# EAGLE board Proto_Cape (EAGLE 7.7.0)
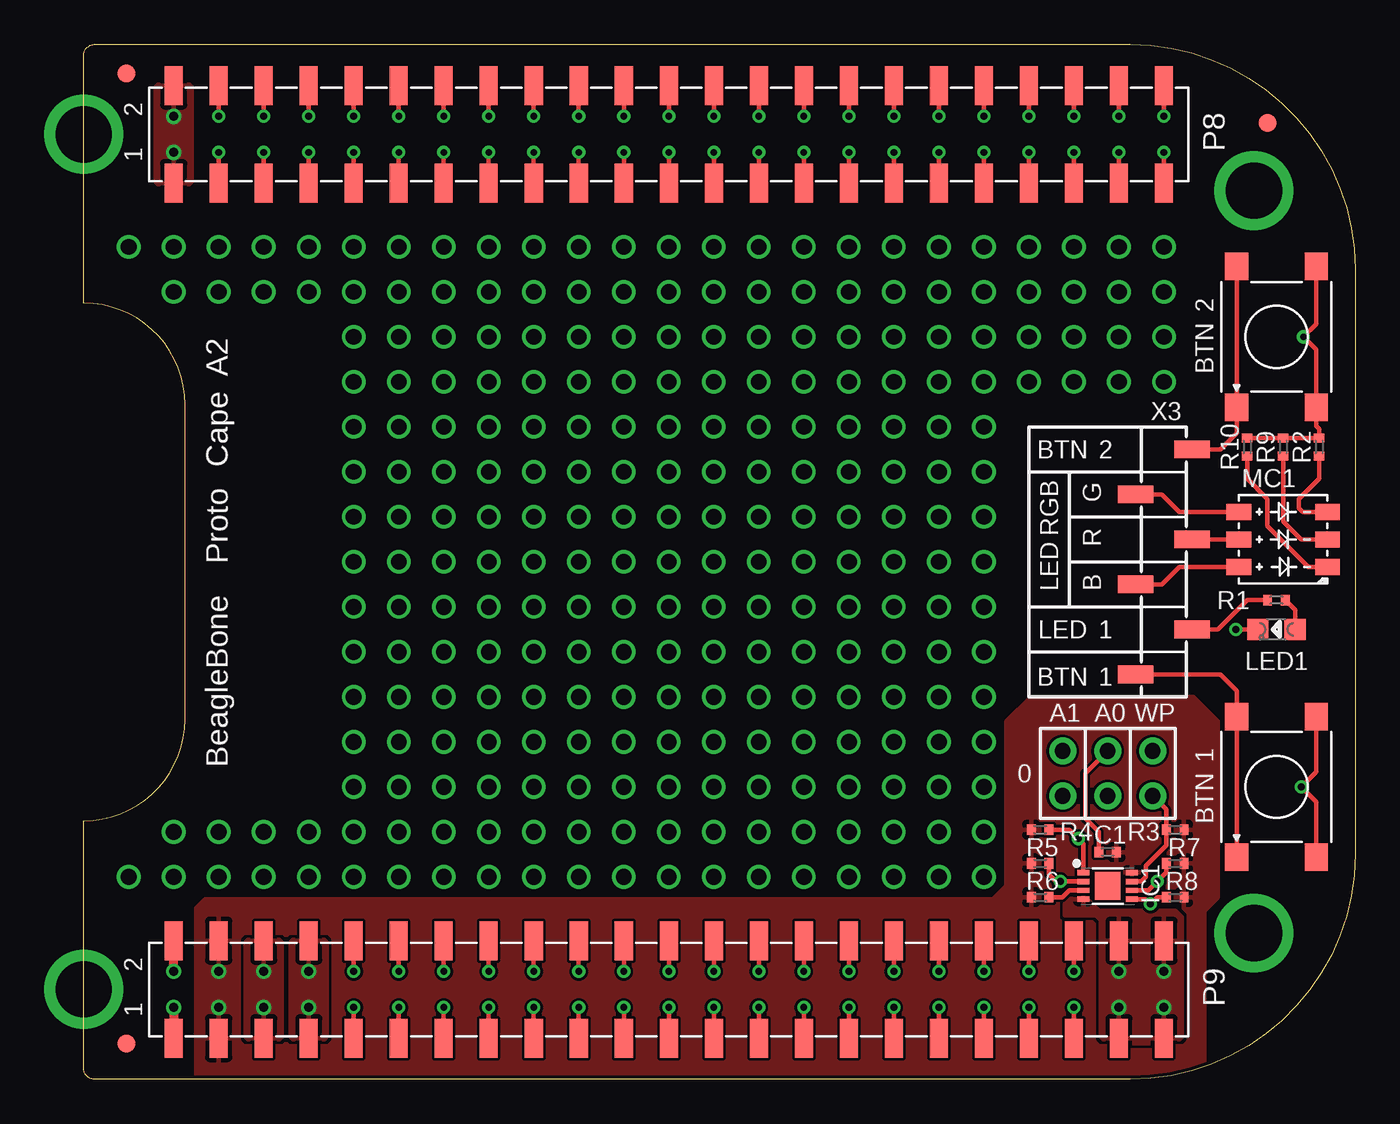
[diagram p0: board, top side]
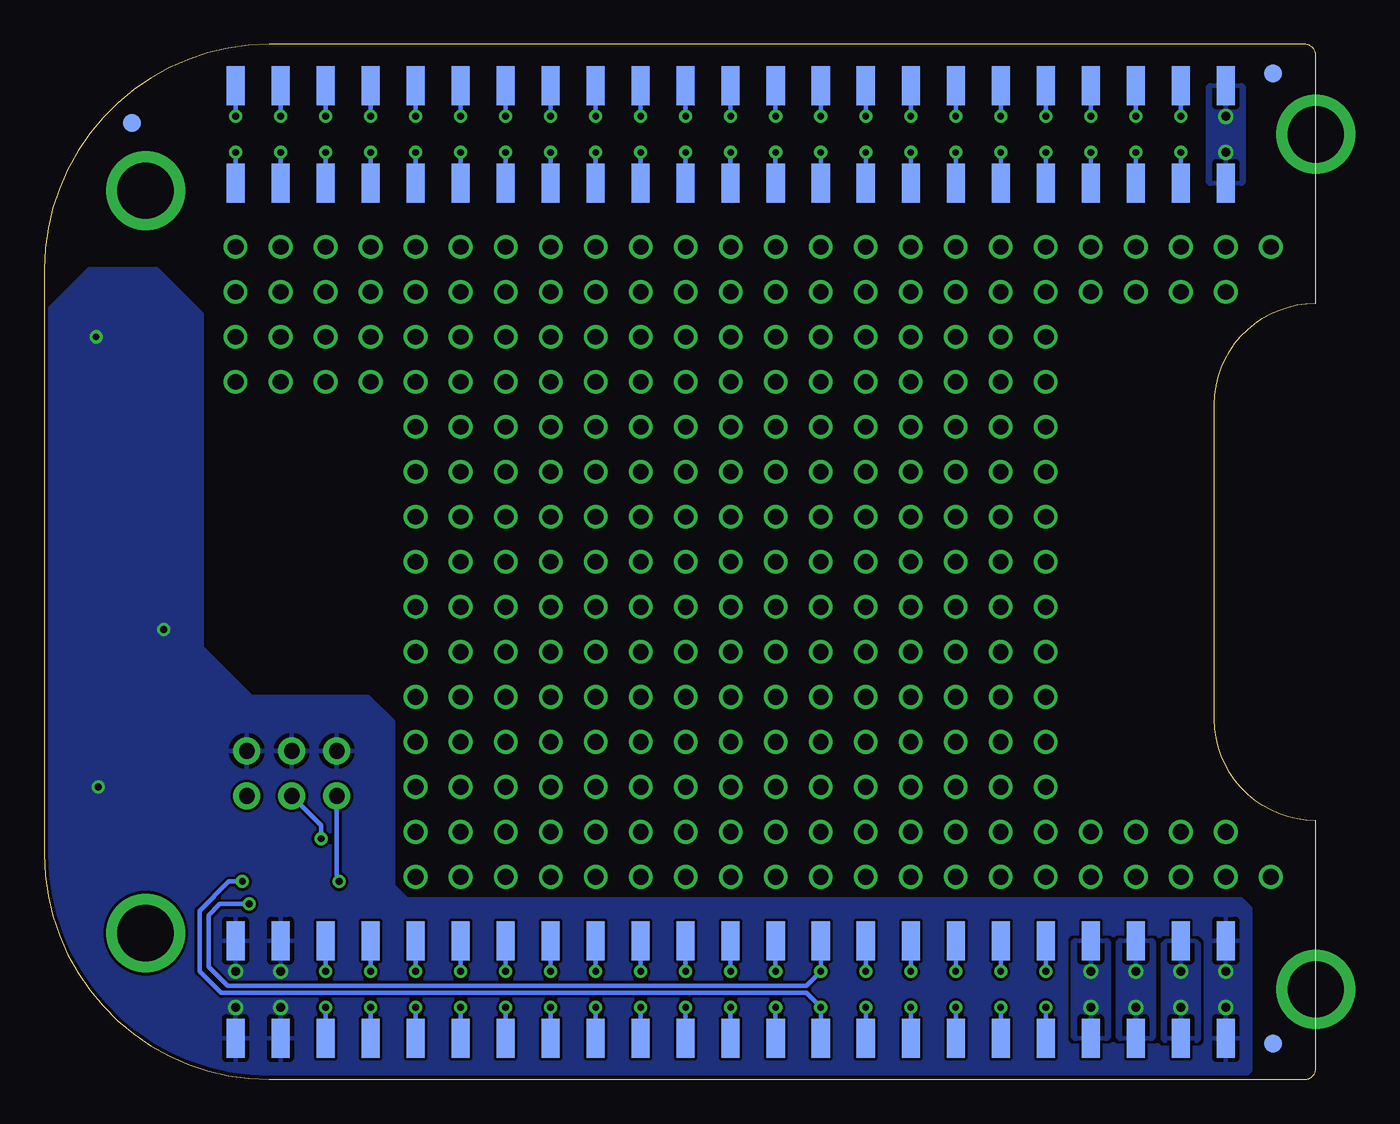
[diagram p1: board, bottom side, seen from below]

Size 71.75 x 58.42 mm. Coordinates in mm from the lower left corner, seen from the top.
Copper layers (1+16): Top 0.035mm / dielectric 1.5mm / Bottom 0.035mm
Design rules "SparkFun-2-layer *": minimum track width 7mil, minimum drill 15mil, track to track 6mil, track to pad 6mil, pad to pad 6mil, via to via 6mil, smd to smd 6mil, copper to edge 8mil, drill to drill 8mil, minimum pad ring 12mil, minimum via ring 7mil, stop-mask expansion 4mil, vias tented up to drill 32mil, thermal gap 10mil

## Footprints (pad centres in the part's own frame; a part is rotated, then mirrored left to right if it is on the bottom)
BEAGLEBONE.CAPE.TOP/BOTTOM-PADS = smd 1.02 x 2.2 bottom: B8.1 5.08,50.59; B8.2 5.08,56.09; B8.3 7.62,50.59; B8.4 7.62,56.09; B8.5 10.16,50.59; B8.6 10.16,56.09; B8.7 12.7,50.59; B8.8 12.7,56.09; B8.9 15.24,50.59; B8.10 15.24,56.09; B8.11 17.78,50.59; B8.12 17.78,56.09; B8.13 20.32,50.59; B8.14 20.32,56.09; B8.15 22.86,50.59; B8.16 22.86,56.09; B8.17 25.4,50.59; B8.18 25.4,56.09; B8.19 27.94,50.59; B8.20 27.94,56.09; B8.21 30.48,50.59; B8.22 30.48,56.09; B8.23 33.02,50.59; B8.24 33.02,56.09; B8.25 35.56,50.59; B8.26 35.56,56.09; B8.27 38.1,50.59; B8.28 38.1,56.09; B8.29 40.64,50.59; B8.30 40.64,56.09; B8.31 43.18,50.59; B8.32 43.18,56.09; B8.33 45.72,50.59; B8.34 45.72,56.09; B8.35 48.26,50.59; B8.36 48.26,56.09; B8.37 50.8,50.59; B8.38 50.8,56.09; B8.39 53.34,50.59; B8.40 53.34,56.09; B8.41 55.88,50.59; B8.42 55.88,56.09; B8.43 58.42,50.59; B8.44 58.42,56.09; B8.45 60.96,50.59; B8.46 60.96,56.09; B9.1 5.08,2.33; B9.2 5.08,7.83; B9.3 7.62,2.33; B9.4 7.62,7.83; B9.5 10.16,2.33; B9.6 10.16,7.83; B9.7 12.7,2.33; B9.8 12.7,7.83; B9.9 15.24,2.33; B9.10 15.24,7.83; B9.11 17.78,2.33; B9.12 17.78,7.83; B9.13 20.32,2.33; B9.14 20.32,7.83; B9.15 22.86,2.33; B9.16 22.86,7.83; B9.17 25.4,2.33; B9.18 25.4,7.83; B9.19 27.94,2.33; B9.20 27.94,7.83; B9.21 30.48,2.33; B9.22 30.48,7.83; B9.23 33.02,2.33; B9.24 33.02,7.83; B9.25 35.56,2.33; B9.26 35.56,7.83; B9.27 38.1,2.33; B9.28 38.1,7.83; B9.29 40.64,2.33; B9.30 40.64,7.83; B9.31 43.18,2.33; B9.32 43.18,7.83; B9.33 45.72,2.33; B9.34 45.72,7.83; B9.35 48.26,2.33; B9.36 48.26,7.83; B9.37 50.8,2.33; B9.38 50.8,7.83; B9.39 53.34,2.33; B9.40 53.34,7.83; B9.41 55.88,2.33; B9.42 55.88,7.83; B9.43 58.42,2.33; B9.44 58.42,7.83; B9.45 60.96,2.33; B9.46 60.96,7.83 | drill 3.175 pad 4.445: MH.1 0,5.08; MH.2 66.04,8.255; MH.3 66.04,50.165; MH.4 0,53.34 | smd 1.02 x 2.2: T8.1 5.08,50.59; T8.2 5.08,56.09; T8.3 7.62,50.59; T8.4 7.62,56.09; T8.5 10.16,50.59; T8.6 10.16,56.09; T8.7 12.7,50.59; T8.8 12.7,56.09; T8.9 15.24,50.59; T8.10 15.24,56.09; T8.11 17.78,50.59; T8.12 17.78,56.09; T8.13 20.32,50.59; T8.14 20.32,56.09; T8.15 22.86,50.59; T8.16 22.86,56.09; T8.17 25.4,50.59; T8.18 25.4,56.09; T8.19 27.94,50.59; T8.20 27.94,56.09; T8.21 30.48,50.59; T8.22 30.48,56.09; T8.23 33.02,50.59; T8.24 33.02,56.09; T8.25 35.56,50.59; T8.26 35.56,56.09; T8.27 38.1,50.59; T8.28 38.1,56.09; T8.29 40.64,50.59; T8.30 40.64,56.09; T8.31 43.18,50.59; T8.32 43.18,56.09; T8.33 45.72,50.59; T8.34 45.72,56.09; T8.35 48.26,50.59; T8.36 48.26,56.09; T8.37 50.8,50.59; T8.38 50.8,56.09; T8.39 53.34,50.59; T8.40 53.34,56.09; T8.41 55.88,50.59; T8.42 55.88,56.09; T8.43 58.42,50.59; T8.44 58.42,56.09; T8.45 60.96,50.59; T8.46 60.96,56.09; T9.1 5.08,2.33; T9.2 5.08,7.83; T9.3 7.62,2.33; T9.4 7.62,7.83; T9.5 10.16,2.33; T9.6 10.16,7.83; T9.7 12.7,2.33; T9.8 12.7,7.83; T9.9 15.24,2.33; T9.10 15.24,7.83; T9.11 17.78,2.33; T9.12 17.78,7.83; T9.13 20.32,2.33; T9.14 20.32,7.83; T9.15 22.86,2.33; T9.16 22.86,7.83; T9.17 25.4,2.33; T9.18 25.4,7.83; T9.19 27.94,2.33; T9.20 27.94,7.83; T9.21 30.48,2.33; T9.22 30.48,7.83; T9.23 33.02,2.33; T9.24 33.02,7.83; T9.25 35.56,2.33; T9.26 35.56,7.83; T9.27 38.1,2.33; T9.28 38.1,7.83; T9.29 40.64,2.33; T9.30 40.64,7.83; T9.31 43.18,2.33; T9.32 43.18,7.83; T9.33 45.72,2.33; T9.34 45.72,7.83; T9.35 48.26,2.33; T9.36 48.26,7.83; T9.37 50.8,2.33; T9.38 50.8,7.83; T9.39 53.34,2.33; T9.40 53.34,7.83; T9.41 55.88,2.33; T9.42 55.88,7.83; T9.43 58.42,2.33; T9.44 58.42,7.83; T9.45 60.96,2.33; T9.46 60.96,7.83
0402 = smd 0.5 x 0.6: 1 -0.5,0; 2 0.5,0
FIDUCIAL_40MIL = smd 1.016 x 1.016: P$1 0,0
UDFN8,2X3(ON-SEMI) = smd 0.3 x 0.68: 1 0.75,1.36; 2 0.25,1.36; 3 -0.25,1.36; 4 -0.75,1.36; 5 -0.75,-1.36; 6 -0.25,-1.36; 7 0.25,-1.36; 8 0.75,-1.36 | smd 1.56 x 1.45: P$1 0,0
JUMPER-(X2) = drill 0.889 pad 1.524: 1 -1.27,0; 2 1.27,0
0805-LED = smd 1.2 x 1.2: A 0,1.05; K 0,-1.05
LED_RGB_5050 = smd 1.4 x 0.9: 1(+) -2.5,-1.55; 2(+) -2.5,0; 3(+) -2.5,1.55; 4(-) 2.5,1.55; 5(-) 2.5,0; 6(-) 2.5,-1.55
6MM_TACTILE-SWITCH = smd 1.55 x 1.3: 1 -3.975,2.25; 2 3.975,2.25; 3 -3.975,-2.25; 4 3.975,-2.25
SMT-1X6 = smd 1 x 2: 1 -6.35,1.59; 2 -3.81,-1.59; 3 -1.27,1.59; 4 1.27,-1.59; 5 3.81,1.59; 6 6.35,-1.59

## Placement (x,y rotation side)
BB.CAPE1  BEAGLEBONE.CAPE.TOP/BOTTOM-PADS  [BEAGLEBONE.CAPE.TOP/BOTTOM-PADS]  0,0 0 top
C1  [0402]  57.78,12.83 180 top
FUD1  FIDUCIAL  [FIDUCIAL_40MIL]  2.41,2.03 0 top
FUD2  FIDUCIAL  [FIDUCIAL_40MIL]  66.8,53.98 0 top
FUD3  FIDUCIAL  [FIDUCIAL_40MIL]  2.41,56.77 0 top
FUD4  FIDUCIAL  [FIDUCIAL_40MIL]  2.41,2.03 0 bottom
FUD5  FIDUCIAL  [FIDUCIAL_40MIL]  66.8,53.98 0 bottom
FUD6  FIDUCIAL  [FIDUCIAL_40MIL]  2.41,56.77 0 bottom
IC1  [UDFN8,2X3(ON-SEMI)]  57.78,10.92 90 top
JMP1  JUMPER-(X2)  [JUMPER-(X2)]  60.33,17.27 90 top
JMP2  JUMPER-(X2)  [JUMPER-(X2)]  57.78,17.27 270 top
JMP3  JUMPER-(X2)  [JUMPER-(X2)]  55.24,17.27 270 top
LED1  GREEN  [0805-LED]  67.31,25.4 270 top
MC1  JNS5050RGB  [LED_RGB_5050]  67.69,30.48 0 top
R1  1k  [0402]  67.31,27.05 180 top
R2  1k  [0402]  69.72,35.69 270 top
R3  1k  [0402]  61.59,14.1 0 top
R4  1k  [0402]  53.98,14.1 0 top
R5  1k  [0402]  53.98,12.19 0 top
R6  1k  [0402]  53.98,10.29 0 top
R7  DNP(2.2k)  [0402]  61.59,12.19 0 top
R8  DNP(2.2k)  [0402]  61.59,10.29 0 top
R9  1k  [0402]  67.69,35.69 270 top
R10  1k  [0402]  65.66,35.69 270 top
X1  [6MM_TACTILE-SWITCH]  67.31,16.51 90 top
X2  [6MM_TACTILE-SWITCH]  67.31,41.91 90 top
X3  [SMT-1X6]  60.96,29.21 90 top

## Library data of the parts
BB.CAPE1 = GHI-Solutions
C1 LED1 R1-R10 = GHI-BasicComponents
FUD1-FUD6 = GHI
IC1 = GHI-IC
JMP1-JMP3 X3 = GHI-Headers
MC1 X1 X2 = GHI2

## Nets
+5V: BB.CAPE1.B9.7 BB.CAPE1.B9.8 BB.CAPE1.T9.7 BB.CAPE1.T9.8
A0: IC1.1 JMP2.2 R4.2
A1: IC1.2 JMP3.2 R5.2
A2: IC1.3 R6.2
BTN1: X1.1 X1.2 X3.1
BTN2: X2.1 X2.2 X3.6
COMMON.GND: BB.CAPE1.B8.1 BB.CAPE1.B8.2 BB.CAPE1.T8.1 BB.CAPE1.T8.2
GND: BB.CAPE1.B9.1 BB.CAPE1.B9.2 BB.CAPE1.B9.43 BB.CAPE1.B9.44 BB.CAPE1.B9.45 BB.CAPE1.B9.46 BB.CAPE1.T9.1 BB.CAPE1.T9.2 BB.CAPE1.T9.43 BB.CAPE1.T9.44 BB.CAPE1.T9.45 BB.CAPE1.T9.46 C1.2 IC1.4 JMP1.2 JMP2.1 JMP3.1 LED1.K R2.1 R9.1 R10.1 X1.3 X1.4 X2.3 X2.4
LED1: R1.2 X3.2
LED.RGB.B: MC1.1(+) X3.3
LED.RGB.G: MC1.3(+) X3.5
LED.RGB.R: MC1.2(+) X3.4
N$3: MC1.4(-) R2.2
N$4: MC1.5(-) R9.2
N$5: MC1.6(-) R10.2
N$9: LED1.A R1.1
P8.3: BB.CAPE1.B8.3 BB.CAPE1.T8.3
P8.4: BB.CAPE1.B8.4 BB.CAPE1.T8.4
P8.5: BB.CAPE1.B8.5 BB.CAPE1.T8.5
P8.6: BB.CAPE1.B8.6 BB.CAPE1.T8.6
P8.7: BB.CAPE1.B8.7 BB.CAPE1.T8.7
P8.8: BB.CAPE1.B8.8 BB.CAPE1.T8.8
P8.9: BB.CAPE1.B8.9 BB.CAPE1.T8.9
P8.10: BB.CAPE1.B8.10 BB.CAPE1.T8.10
P8.11: BB.CAPE1.B8.11 BB.CAPE1.T8.11
P8.12: BB.CAPE1.B8.12 BB.CAPE1.T8.12
P8.13: BB.CAPE1.B8.13 BB.CAPE1.T8.13
P8.14: BB.CAPE1.B8.14 BB.CAPE1.T8.14
P8.15: BB.CAPE1.B8.15 BB.CAPE1.T8.15
P8.16: BB.CAPE1.B8.16 BB.CAPE1.T8.16
P8.17: BB.CAPE1.B8.17 BB.CAPE1.T8.17
P8.18: BB.CAPE1.B8.18 BB.CAPE1.T8.18
P8.19: BB.CAPE1.B8.19 BB.CAPE1.T8.19
P8.20: BB.CAPE1.B8.20 BB.CAPE1.T8.20
P8.21: BB.CAPE1.B8.21 BB.CAPE1.T8.21
P8.22: BB.CAPE1.B8.22 BB.CAPE1.T8.22
P8.23: BB.CAPE1.B8.23 BB.CAPE1.T8.23
P8.24: BB.CAPE1.B8.24 BB.CAPE1.T8.24
P8.25: BB.CAPE1.B8.25 BB.CAPE1.T8.25
P8.26: BB.CAPE1.B8.26 BB.CAPE1.T8.26
P8.27: BB.CAPE1.B8.27 BB.CAPE1.T8.27
P8.28: BB.CAPE1.B8.28 BB.CAPE1.T8.28
P8.29: BB.CAPE1.B8.29 BB.CAPE1.T8.29
P8.30: BB.CAPE1.B8.30 BB.CAPE1.T8.30
P8.31: BB.CAPE1.B8.31 BB.CAPE1.T8.31
P8.32: BB.CAPE1.B8.32 BB.CAPE1.T8.32
P8.33: BB.CAPE1.B8.33 BB.CAPE1.T8.33
P8.34: BB.CAPE1.B8.34 BB.CAPE1.T8.34
P8.35: BB.CAPE1.B8.35 BB.CAPE1.T8.35
P8.36: BB.CAPE1.B8.36 BB.CAPE1.T8.36
P8.37: BB.CAPE1.B8.37 BB.CAPE1.T8.37
P8.38: BB.CAPE1.B8.38 BB.CAPE1.T8.38
P8.39: BB.CAPE1.B8.39 BB.CAPE1.T8.39
P8.40: BB.CAPE1.B8.40 BB.CAPE1.T8.40
P8.41: BB.CAPE1.B8.41 BB.CAPE1.T8.41
P8.42: BB.CAPE1.B8.42 BB.CAPE1.T8.42
P8.43: BB.CAPE1.B8.43 BB.CAPE1.T8.43
P8.44: BB.CAPE1.B8.44 BB.CAPE1.T8.44
P8.45: BB.CAPE1.B8.45 BB.CAPE1.T8.45
P8.46: BB.CAPE1.B8.46 BB.CAPE1.T8.46
P9.9: BB.CAPE1.B9.9 BB.CAPE1.T9.9
P9.10: BB.CAPE1.B9.10 BB.CAPE1.T9.10
P9.11: BB.CAPE1.B9.11 BB.CAPE1.T9.11
P9.12: BB.CAPE1.B9.12 BB.CAPE1.T9.12
P9.13: BB.CAPE1.B9.13 BB.CAPE1.T9.13
P9.14: BB.CAPE1.B9.14 BB.CAPE1.T9.14
P9.15: BB.CAPE1.B9.15 BB.CAPE1.T9.15
P9.16: BB.CAPE1.B9.16 BB.CAPE1.T9.16
P9.17: BB.CAPE1.B9.17 BB.CAPE1.T9.17
P9.18: BB.CAPE1.B9.18 BB.CAPE1.T9.18
P9.21: BB.CAPE1.B9.21 BB.CAPE1.T9.21
P9.22: BB.CAPE1.B9.22 BB.CAPE1.T9.22
P9.23: BB.CAPE1.B9.23 BB.CAPE1.T9.23
P9.24: BB.CAPE1.B9.24 BB.CAPE1.T9.24
P9.25: BB.CAPE1.B9.25 BB.CAPE1.T9.25
P9.26: BB.CAPE1.B9.26 BB.CAPE1.T9.26
P9.27: BB.CAPE1.B9.27 BB.CAPE1.T9.27
P9.28: BB.CAPE1.B9.28 BB.CAPE1.T9.28
P9.29: BB.CAPE1.B9.29 BB.CAPE1.T9.29
P9.30: BB.CAPE1.B9.30 BB.CAPE1.T9.30
P9.31: BB.CAPE1.B9.31 BB.CAPE1.T9.31
P9.32: BB.CAPE1.B9.32 BB.CAPE1.T9.32
P9.33: BB.CAPE1.B9.33 BB.CAPE1.T9.33
P9.34: BB.CAPE1.B9.34 BB.CAPE1.T9.34
P9.35: BB.CAPE1.B9.35 BB.CAPE1.T9.35
P9.36: BB.CAPE1.B9.36 BB.CAPE1.T9.36
P9.37: BB.CAPE1.B9.37 BB.CAPE1.T9.37
P9.38: BB.CAPE1.B9.38 BB.CAPE1.T9.38
P9.39: BB.CAPE1.B9.39 BB.CAPE1.T9.39
P9.40: BB.CAPE1.B9.40 BB.CAPE1.T9.40
P9.41: BB.CAPE1.B9.41 BB.CAPE1.T9.41
P9.42: BB.CAPE1.B9.42 BB.CAPE1.T9.42
SCL: BB.CAPE1.B9.19 BB.CAPE1.T9.19 IC1.6 R7.1
SDA: BB.CAPE1.B9.20 BB.CAPE1.T9.20 IC1.5 R8.1
VCC: BB.CAPE1.B9.3 BB.CAPE1.B9.4 BB.CAPE1.T9.3 BB.CAPE1.T9.4 C1.1 IC1.8 R3.2 R4.1 R5.1 R6.1 R7.2 R8.2
VDD_5V: BB.CAPE1.B9.5 BB.CAPE1.B9.6 BB.CAPE1.T9.5 BB.CAPE1.T9.6
WP: IC1.7 JMP1.1 R3.1

## Tracks (layer width: path | path; a pad name or v marks a point on that pad's centre or on a via)
+5V  (via drill 0.51 pad 0.18)
  other vias: 12.7,6.1 12.7,4.06
  pour Top: 13.34,8.13 12.06,8.13 11.68,7.75 11.68,2.41 12.06,2.03 13.34,2.03 13.72,2.41 13.72,7.75
  pour Bottom: 13.34,8.13 12.06,8.13 11.68,7.75 11.68,2.41 12.06,2.03 13.34,2.03 13.72,2.41 13.72,7.75
A0  (via drill 0.38 pad 0.18)
  Top 0.254: IC1.1 56.42,13.3 v56.13,13.59 55.63,14.1 R4.2
  Bottom 0.254: JMP2.2 56.13,14.35 v56.13,13.59
A1  (via drill 0.38 pad 0.18)
  Top 0.254: R5.2 54.48,11.56 54.86,11.18 v55.12,11.18 v55.12,11.17 IC1.2
  Bottom 0.254: JMP3.2 55.24,11.3 v55.12,11.18
A2
  Top 0.254: IC1.3 55.62,10.67 55.24,10.29 R6.2
BTN1
  Top 0.254: X1.1 X1.2 65.06,21.93 64.14,22.86 X3.1
BTN2
  Top 0.254: X2.2 X2.1 65.06,36.48 64.14,35.56 X3.6
COMMON.GND  (via drill 0.51 pad 0.18)
  other vias: 5.08,52.32 5.08,54.36
  pour Bottom: 5.71,56.39 4.45,56.39 4.06,56.01 4.06,50.67 4.45,50.29 5.71,50.29 6.1,50.67 6.1,56.01
  pour Top: 5.71,56.39 4.45,56.39 4.06,56.01 4.06,50.67 4.45,50.29 5.71,50.29 6.1,50.67 6.1,56.01
GND  (via drill 0.38 pad 0.18, 0.51 pad 0.18)
  Top 0.254: C1.2 57.28,13.96 56.52,14.73 56.52,17.27 JMP2.1 | R10.1 R9.1 R2.1 69.72,36.7 69.56,36.87 X2.3 69.56,41.18 v68.83,41.91 69.56,42.64 X2.4 | X1.3 69.56,15.66 v68.71,16.51 69.56,17.36 X1.4 | LED1.K v65.02,25.4
  Top 0.508: v5.08,4.06 BB.CAPE1.T9.1 | v5.08,6.1 BB.CAPE1.T9.2
  other vias: 58.42,6.1 60.96,6.1 58.42,4.06 60.96,4.06
  pour Bottom (rank 2): 3.68,9.65 3.68,0.51 4.19,0 71.75,0 71.75,43.18 69.22,45.72 65.41,45.72 62.87,43.18 62.87,24.38 60.07,21.59 53.47,21.59 52.07,20.19 52.07,10.92 51.31,10.16 4.19,10.16
  pour Top: 61.59,9.53 57.28,9.53 56.52,10.29 55.75,10.29 55.37,9.91 55.37,9.27 57.15,9.27 57.4,9.02 57.4,2.41 57.78,2.03 61.59,2.03 61.98,2.41 61.98,9.14
LED1
  Top 0.254: X3.2 64.01,25.4 65.66,27.05 R1.2
LED.RGB.B
  Top 0.254: X3.3 60.83,27.94 61.82,28.93 MC1.1(+)
LED.RGB.G
  Top 0.254: X3.5 60.83,33.02 61.82,32.03 MC1.3(+)
LED.RGB.R
  Top 0.254: X3.4 MC1.2(+)
N$1  (via drill 0.89)
  other vias: 7.62,11.43
N$2  (via drill 0.89)
  other vias: 7.62,13.97
N$3
  Top 0.254: MC1.4(-) 68.81,32.03 68.58,32.26 68.58,32.77 69.72,33.91 R2.2
N$4
  Top 0.254: MC1.5(-) 68.71,30.48 67.69,31.5 R9.2
N$5
  Top 0.254: MC1.6(-) 69.11,28.93 66.8,31.24 66.8,32.77 65.66,33.91 R10.2
N$6  (via drill 0.89)
  other vias: 50.8,36.83
N$7  (via drill 0.89)
  other vias: 50.8,34.29
N$8  (via drill 0.89)
  other vias: 50.8,31.75
N$9
  Top 0.254: LED1.A 68.36,26.5 R1.1
N$10  (via drill 0.89)
  other vias: 50.8,29.21
N$11  (via drill 0.89)
  other vias: 50.8,26.67
N$12  (via drill 0.89)
  other vias: 50.8,24.13
N$13  (via drill 0.89)
  other vias: 50.8,21.59
N$14  (via drill 0.89)
  other vias: 7.62,44.45
N$15  (via drill 0.89)
  other vias: 7.62,46.99
N$16  (via drill 0.89)
  other vias: 10.16,11.43
N$17  (via drill 0.89)
  other vias: 10.16,13.97
N$29  (via drill 0.89)
  other vias: 10.16,44.45
N$30  (via drill 0.89)
  other vias: 10.16,46.99
N$31  (via drill 0.89)
  other vias: 12.7,11.43
N$32  (via drill 0.89)
  other vias: 12.7,13.97
N$44  (via drill 0.89)
  other vias: 12.7,44.45
N$45  (via drill 0.89)
  other vias: 12.7,46.99
N$46  (via drill 0.89)
  other vias: 15.24,11.43
N$47  (via drill 0.89)
  other vias: 15.24,13.97
N$48  (via drill 0.89)
  other vias: 15.24,16.51
N$49  (via drill 0.89)
  other vias: 15.24,19.05
N$50  (via drill 0.89)
  other vias: 15.24,21.59
N$51  (via drill 0.89)
  other vias: 15.24,24.13
N$52  (via drill 0.89)
  other vias: 15.24,26.67
N$53  (via drill 0.89)
  other vias: 15.24,29.21
N$54  (via drill 0.89)
  other vias: 15.24,31.75
N$55  (via drill 0.89)
  other vias: 15.24,34.29
N$56  (via drill 0.89)
  other vias: 15.24,36.83
N$57  (via drill 0.89)
  other vias: 15.24,39.37
N$58  (via drill 0.89)
  other vias: 15.24,41.91
N$59  (via drill 0.89)
  other vias: 15.24,44.45
N$60  (via drill 0.89)
  other vias: 15.24,46.99
N$61  (via drill 0.89)
  other vias: 17.78,11.43
N$62  (via drill 0.89)
  other vias: 17.78,13.97
N$63  (via drill 0.89)
  other vias: 17.78,16.51
N$64  (via drill 0.89)
  other vias: 17.78,19.05
N$65  (via drill 0.89)
  other vias: 17.78,21.59
N$66  (via drill 0.89)
  other vias: 17.78,24.13
N$67  (via drill 0.89)
  other vias: 17.78,26.67
N$68  (via drill 0.89)
  other vias: 17.78,29.21
N$69  (via drill 0.89)
  other vias: 17.78,31.75
N$70  (via drill 0.89)
  other vias: 17.78,34.29
N$71  (via drill 0.89)
  other vias: 17.78,36.83
N$72  (via drill 0.89)
  other vias: 17.78,39.37
N$73  (via drill 0.89)
  other vias: 17.78,41.91
N$74  (via drill 0.89)
  other vias: 17.78,44.45
N$75  (via drill 0.89)
  other vias: 17.78,46.99
N$76  (via drill 0.89)
  other vias: 20.32,11.43
N$77  (via drill 0.89)
  other vias: 20.32,13.97
N$78  (via drill 0.89)
  other vias: 20.32,16.51
N$79  (via drill 0.89)
  other vias: 20.32,19.05
N$80  (via drill 0.89)
  other vias: 20.32,21.59
N$81  (via drill 0.89)
  other vias: 20.32,24.13
N$82  (via drill 0.89)
  other vias: 20.32,26.67
N$83  (via drill 0.89)
  other vias: 20.32,29.21
N$84  (via drill 0.89)
  other vias: 20.32,31.75
N$85  (via drill 0.89)
  other vias: 20.32,34.29
N$86  (via drill 0.89)
  other vias: 20.32,36.83
N$87  (via drill 0.89)
  other vias: 20.32,39.37
N$88  (via drill 0.89)
  other vias: 20.32,41.91
N$89  (via drill 0.89)
  other vias: 20.32,44.45
N$90  (via drill 0.89)
  other vias: 20.32,46.99
N$91  (via drill 0.89)
  other vias: 22.86,11.43
N$92  (via drill 0.89)
  other vias: 22.86,13.97
N$93  (via drill 0.89)
  other vias: 22.86,16.51
N$94  (via drill 0.89)
  other vias: 22.86,19.05
N$95  (via drill 0.89)
  other vias: 22.86,21.59
N$96  (via drill 0.89)
  other vias: 22.86,24.13
N$97  (via drill 0.89)
  other vias: 22.86,26.67
N$98  (via drill 0.89)
  other vias: 22.86,29.21
N$99  (via drill 0.89)
  other vias: 22.86,31.75
N$100  (via drill 0.89)
  other vias: 22.86,34.29
N$101  (via drill 0.89)
  other vias: 22.86,36.83
N$102  (via drill 0.89)
  other vias: 22.86,39.37
N$103  (via drill 0.89)
  other vias: 22.86,41.91
N$104  (via drill 0.89)
  other vias: 22.86,44.45
N$105  (via drill 0.89)
  other vias: 22.86,46.99
N$106  (via drill 0.89)
  other vias: 25.4,11.43
N$107  (via drill 0.89)
  other vias: 25.4,13.97
N$108  (via drill 0.89)
  other vias: 25.4,16.51
N$109  (via drill 0.89)
  other vias: 25.4,19.05
N$110  (via drill 0.89)
  other vias: 25.4,21.59
N$111  (via drill 0.89)
  other vias: 25.4,24.13
N$112  (via drill 0.89)
  other vias: 25.4,26.67
N$113  (via drill 0.89)
  other vias: 25.4,29.21
N$114  (via drill 0.89)
  other vias: 25.4,31.75
N$115  (via drill 0.89)
  other vias: 25.4,34.29
N$116  (via drill 0.89)
  other vias: 25.4,36.83
N$117  (via drill 0.89)
  other vias: 25.4,39.37
N$118  (via drill 0.89)
  other vias: 25.4,41.91
N$119  (via drill 0.89)
  other vias: 25.4,44.45
N$120  (via drill 0.89)
  other vias: 25.4,46.99
N$121  (via drill 0.89)
  other vias: 27.94,11.43
N$122  (via drill 0.89)
  other vias: 27.94,13.97
N$123  (via drill 0.89)
  other vias: 27.94,16.51
N$124  (via drill 0.89)
  other vias: 27.94,19.05
N$125  (via drill 0.89)
  other vias: 27.94,21.59
N$126  (via drill 0.89)
  other vias: 27.94,24.13
N$127  (via drill 0.89)
  other vias: 27.94,26.67
N$128  (via drill 0.89)
  other vias: 27.94,29.21
N$129  (via drill 0.89)
  other vias: 27.94,31.75
N$130  (via drill 0.89)
  other vias: 27.94,34.29
N$131  (via drill 0.89)
  other vias: 27.94,36.83
N$132  (via drill 0.89)
  other vias: 27.94,39.37
N$133  (via drill 0.89)
  other vias: 27.94,41.91
N$134  (via drill 0.89)
  other vias: 27.94,44.45
N$135  (via drill 0.89)
  other vias: 27.94,46.99
N$136  (via drill 0.89)
  other vias: 30.48,11.43
N$137  (via drill 0.89)
  other vias: 30.48,13.97
N$138  (via drill 0.89)
  other vias: 30.48,16.51
N$139  (via drill 0.89)
  other vias: 30.48,19.05
N$140  (via drill 0.89)
  other vias: 30.48,21.59
N$141  (via drill 0.89)
  other vias: 30.48,24.13
N$142  (via drill 0.89)
  other vias: 30.48,26.67
N$143  (via drill 0.89)
  other vias: 30.48,29.21
N$144  (via drill 0.89)
  other vias: 30.48,31.75
N$145  (via drill 0.89)
  other vias: 30.48,34.29
N$146  (via drill 0.89)
  other vias: 30.48,36.83
N$147  (via drill 0.89)
  other vias: 30.48,39.37
N$148  (via drill 0.89)
  other vias: 30.48,41.91
N$149  (via drill 0.89)
  other vias: 30.48,44.45
N$150  (via drill 0.89)
  other vias: 30.48,46.99
N$151  (via drill 0.89)
  other vias: 33.02,11.43
N$152  (via drill 0.89)
  other vias: 33.02,13.97
N$153  (via drill 0.89)
  other vias: 33.02,16.51
N$154  (via drill 0.89)
  other vias: 33.02,19.05
N$155  (via drill 0.89)
  other vias: 33.02,21.59
N$156  (via drill 0.89)
  other vias: 33.02,24.13
N$157  (via drill 0.89)
  other vias: 33.02,26.67
N$158  (via drill 0.89)
  other vias: 33.02,29.21
N$159  (via drill 0.89)
  other vias: 33.02,31.75
N$160  (via drill 0.89)
  other vias: 33.02,34.29
N$161  (via drill 0.89)
  other vias: 33.02,36.83
N$162  (via drill 0.89)
  other vias: 33.02,39.37
N$163  (via drill 0.89)
  other vias: 33.02,41.91
N$164  (via drill 0.89)
  other vias: 33.02,44.45
N$165  (via drill 0.89)
  other vias: 33.02,46.99
N$166  (via drill 0.89)
  other vias: 35.56,11.43
N$167  (via drill 0.89)
  other vias: 35.56,13.97
N$168  (via drill 0.89)
  other vias: 35.56,16.51
N$169  (via drill 0.89)
  other vias: 35.56,19.05
N$170  (via drill 0.89)
  other vias: 35.56,21.59
N$171  (via drill 0.89)
  other vias: 35.56,24.13
N$172  (via drill 0.89)
  other vias: 35.56,26.67
N$173  (via drill 0.89)
  other vias: 35.56,29.21
N$174  (via drill 0.89)
  other vias: 35.56,31.75
N$175  (via drill 0.89)
  other vias: 35.56,34.29
N$176  (via drill 0.89)
  other vias: 35.56,36.83
N$177  (via drill 0.89)
  other vias: 35.56,39.37
N$178  (via drill 0.89)
  other vias: 35.56,41.91
N$179  (via drill 0.89)
  other vias: 35.56,44.45
N$180  (via drill 0.89)
  other vias: 35.56,46.99
N$181  (via drill 0.89)
  other vias: 38.1,11.43
N$182  (via drill 0.89)
  other vias: 38.1,13.97
N$183  (via drill 0.89)
  other vias: 38.1,16.51
N$184  (via drill 0.89)
  other vias: 38.1,19.05
N$185  (via drill 0.89)
  other vias: 38.1,21.59
N$186  (via drill 0.89)
  other vias: 38.1,24.13
N$187  (via drill 0.89)
  other vias: 38.1,26.67
N$188  (via drill 0.89)
  other vias: 38.1,29.21
N$189  (via drill 0.89)
  other vias: 38.1,31.75
N$190  (via drill 0.89)
  other vias: 38.1,34.29
N$191  (via drill 0.89)
  other vias: 38.1,36.83
N$192  (via drill 0.89)
  other vias: 38.1,39.37
N$193  (via drill 0.89)
  other vias: 38.1,41.91
N$194  (via drill 0.89)
  other vias: 38.1,44.45
N$195  (via drill 0.89)
  other vias: 38.1,46.99
N$196  (via drill 0.89)
  other vias: 40.64,11.43
N$197  (via drill 0.89)
  other vias: 40.64,13.97
N$198  (via drill 0.89)
  other vias: 40.64,16.51
N$199  (via drill 0.89)
  other vias: 40.64,19.05
N$200  (via drill 0.89)
  other vias: 40.64,21.59
N$201  (via drill 0.89)
  other vias: 40.64,24.13
N$202  (via drill 0.89)
  other vias: 40.64,26.67
N$203  (via drill 0.89)
  other vias: 40.64,29.21
N$204  (via drill 0.89)
  other vias: 40.64,31.75
N$205  (via drill 0.89)
  other vias: 40.64,34.29
N$206  (via drill 0.89)
  other vias: 40.64,36.83
N$207  (via drill 0.89)
  other vias: 40.64,39.37
N$208  (via drill 0.89)
  other vias: 40.64,41.91
N$209  (via drill 0.89)
  other vias: 40.64,44.45
N$210  (via drill 0.89)
  other vias: 40.64,46.99
N$211  (via drill 0.89)
  other vias: 43.18,11.43
N$212  (via drill 0.89)
  other vias: 43.18,13.97
N$213  (via drill 0.89)
  other vias: 43.18,16.51
N$214  (via drill 0.89)
  other vias: 43.18,19.05
N$215  (via drill 0.89)
  other vias: 43.18,21.59
N$216  (via drill 0.89)
  other vias: 43.18,24.13
N$217  (via drill 0.89)
  other vias: 43.18,26.67
N$218  (via drill 0.89)
  other vias: 43.18,29.21
N$219  (via drill 0.89)
  other vias: 43.18,31.75
N$220  (via drill 0.89)
  other vias: 43.18,34.29
N$222  (via drill 0.89)
  other vias: 43.18,36.83
N$223  (via drill 0.89)
  other vias: 43.18,39.37
N$224  (via drill 0.89)
  other vias: 43.18,41.91
N$225  (via drill 0.89)
  other vias: 43.18,44.45
N$226  (via drill 0.89)
  other vias: 43.18,46.99
N$227  (via drill 0.89)
  other vias: 45.72,11.43
N$228  (via drill 0.89)
  other vias: 45.72,13.97
N$229  (via drill 0.89)
  other vias: 45.72,16.51
N$230  (via drill 0.89)
  other vias: 45.72,19.05
N$231  (via drill 0.89)
  other vias: 45.72,21.59
N$232  (via drill 0.89)
  other vias: 45.72,24.13
N$233  (via drill 0.89)
  other vias: 45.72,26.67
N$234  (via drill 0.89)
  other vias: 45.72,29.21
N$237  (via drill 0.89)
  other vias: 45.72,31.75
N$238  (via drill 0.89)
  other vias: 45.72,34.29
N$239  (via drill 0.89)
  other vias: 45.72,36.83
N$240  (via drill 0.89)
  other vias: 45.72,39.37
N$241  (via drill 0.89)
  other vias: 45.72,41.91
N$242  (via drill 0.89)
  other vias: 45.72,44.45
N$243  (via drill 0.89)
  other vias: 45.72,46.99
N$244  (via drill 0.89)
  other vias: 48.26,11.43
N$245  (via drill 0.89)
  other vias: 48.26,13.97
N$247  (via drill 0.89)
  other vias: 48.26,16.51
N$248  (via drill 0.89)
  other vias: 48.26,19.05
N$249  (via drill 0.89)
  other vias: 48.26,21.59
N$250  (via drill 0.89)
  other vias: 48.26,24.13
N$251  (via drill 0.89)
  other vias: 48.26,26.67
N$252  (via drill 0.89)
  other vias: 48.26,29.21
N$253  (via drill 0.89)
  other vias: 48.26,31.75
N$254  (via drill 0.89)
  other vias: 48.26,34.29
N$255  (via drill 0.89)
  other vias: 48.26,36.83
N$256  (via drill 0.89)
  other vias: 48.26,39.37
N$258  (via drill 0.89)
  other vias: 48.26,41.91
N$259  (via drill 0.89)
  other vias: 48.26,44.45
N$260  (via drill 0.89)
  other vias: 48.26,46.99
N$261  (via drill 0.89)
  other vias: 53.34,39.37
N$262  (via drill 0.89)
  other vias: 55.88,39.37
N$263  (via drill 0.89)
  other vias: 58.42,39.37
N$264  (via drill 0.89)
  other vias: 60.96,39.37
N$265  (via drill 0.89)
  other vias: 50.8,19.05
N$266  (via drill 0.89)
  other vias: 50.8,16.51
N$267  (via drill 0.89)
  other vias: 50.8,13.97
N$270  (via drill 0.89)
  other vias: 50.8,11.43
N$274  (via drill 0.89)
  other vias: 50.8,39.37
N$275  (via drill 0.89)
  other vias: 50.8,41.91
N$276  (via drill 0.89)
  other vias: 50.8,44.45
N$277  (via drill 0.89)
  other vias: 50.8,46.99
N$296  (via drill 0.89)
  other vias: 53.34,41.91
N$297  (via drill 0.89)
  other vias: 53.34,44.45
N$298  (via drill 0.89)
  other vias: 53.34,46.99
N$321  (via drill 0.89)
  other vias: 55.88,41.91
N$323  (via drill 0.89)
  other vias: 55.88,44.45
N$324  (via drill 0.89)
  other vias: 55.88,46.99
N$340  (via drill 0.89)
  other vias: 58.42,41.91
N$341  (via drill 0.89)
  other vias: 58.42,44.45
N$342  (via drill 0.89)
  other vias: 58.42,46.99
N$355  (via drill 0.89)
  other vias: 60.96,41.91
N$356  (via drill 0.89)
  other vias: 60.96,44.45
N$357  (via drill 0.89)
  other vias: 60.96,46.99
N$399  (via drill 0.89)
  other vias: 5.08,11.43
N$400  (via drill 0.89)
  other vias: 5.08,13.97
N$401  (via drill 0.89)
  other vias: 5.08,44.45
N$402  (via drill 0.89)
  other vias: 5.08,46.99
N$403  (via drill 0.89)
  other vias: 2.54,46.99
N$404  (via drill 0.89)
  other vias: 2.54,11.43
P8.3  (via drill 0.38 pad 0.18)
  Top 0.254: BB.CAPE1.B8.3 v7.62,52.32
  Bottom 0.254: v7.62,52.32 BB.CAPE1.B8.3
P8.4  (via drill 0.38 pad 0.18)
  Top 0.254: BB.CAPE1.T8.4 v7.62,54.36
  Bottom 0.254: v7.62,54.36 BB.CAPE1.T8.4
P8.5  (via drill 0.38 pad 0.18)
  Top 0.254: v10.16,52.32 BB.CAPE1.B8.5
  Bottom 0.254: BB.CAPE1.B8.5 v10.16,52.32
P8.6  (via drill 0.38 pad 0.18)
  Top 0.254: v10.16,54.36 BB.CAPE1.T8.6
  Bottom 0.254: BB.CAPE1.T8.6 v10.16,54.36
P8.7  (via drill 0.38 pad 0.18)
  Top 0.254: BB.CAPE1.B8.7 v12.7,52.32
  Bottom 0.254: v12.7,52.32 BB.CAPE1.B8.7
P8.8  (via drill 0.38 pad 0.18)
  Top 0.254: BB.CAPE1.B8.8 v12.7,54.36
  Bottom 0.254: v12.7,54.36 BB.CAPE1.B8.8
P8.9  (via drill 0.38 pad 0.18)
  Top 0.254: v15.24,52.32 BB.CAPE1.T8.9
  Bottom 0.254: BB.CAPE1.T8.9 v15.24,52.32
P8.10  (via drill 0.38 pad 0.18)
  Top 0.254: v15.24,54.36 BB.CAPE1.T8.10
  Bottom 0.254: BB.CAPE1.T8.10 v15.24,54.36
P8.11  (via drill 0.38 pad 0.18)
  Top 0.254: BB.CAPE1.B8.11 v17.78,52.32
  Bottom 0.254: v17.78,52.32 BB.CAPE1.B8.11
P8.12  (via drill 0.38 pad 0.18)
  Top 0.254: BB.CAPE1.T8.12 v17.78,54.36
  Bottom 0.254: v17.78,54.36 BB.CAPE1.T8.12
P8.13  (via drill 0.38 pad 0.18)
  Top 0.254: v20.32,52.32 BB.CAPE1.B8.13
  Bottom 0.254: BB.CAPE1.B8.13 v20.32,52.32
P8.14  (via drill 0.38 pad 0.18)
  Top 0.254: v20.32,54.36 BB.CAPE1.B8.14
  Bottom 0.254: BB.CAPE1.B8.14 v20.32,54.36
P8.15  (via drill 0.38 pad 0.18)
  Top 0.254: BB.CAPE1.T8.15 v22.86,52.32
  Bottom 0.254: v22.86,52.32 BB.CAPE1.T8.15
P8.16  (via drill 0.38 pad 0.18)
  Top 0.254: BB.CAPE1.B8.16 v22.86,54.36
  Bottom 0.254: v22.86,54.36 BB.CAPE1.B8.16
P8.17  (via drill 0.38 pad 0.18)
  Top 0.254: v25.4,52.32 BB.CAPE1.B8.17
  Bottom 0.254: BB.CAPE1.B8.17 v25.4,52.32
P8.18  (via drill 0.38 pad 0.18)
  Top 0.254: v25.4,54.36 BB.CAPE1.T8.18
  Bottom 0.254: BB.CAPE1.T8.18 v25.4,54.36
P8.19  (via drill 0.38 pad 0.18)
  Top 0.254: BB.CAPE1.B8.19 v27.94,52.32
  Bottom 0.254: v27.94,52.32 BB.CAPE1.B8.19
P8.20  (via drill 0.38 pad 0.18)
  Top 0.254: BB.CAPE1.T8.20 v27.94,54.36
  Bottom 0.254: v27.94,54.36 BB.CAPE1.T8.20
P8.21  (via drill 0.38 pad 0.18)
  Top 0.254: v30.48,52.32 BB.CAPE1.T8.21
  Bottom 0.254: BB.CAPE1.T8.21 v30.48,52.32
P8.22  (via drill 0.38 pad 0.18)
  Top 0.254: v30.48,54.36 BB.CAPE1.B8.22
  Bottom 0.254: BB.CAPE1.B8.22 v30.48,54.36
P8.23  (via drill 0.38 pad 0.18)
  Top 0.254: BB.CAPE1.T8.23 v33.02,52.32
  Bottom 0.254: v33.02,52.32 BB.CAPE1.T8.23
P8.24  (via drill 0.38 pad 0.18)
  Top 0.254: BB.CAPE1.T8.24 v33.02,54.36
  Bottom 0.254: v33.02,54.36 BB.CAPE1.T8.24
P8.25  (via drill 0.38 pad 0.18)
  Top 0.254: v35.56,52.32 BB.CAPE1.B8.25
  Bottom 0.254: BB.CAPE1.B8.25 v35.56,52.32
P8.26  (via drill 0.38 pad 0.18)
  Top 0.254: v35.56,54.36 BB.CAPE1.B8.26
  Bottom 0.254: BB.CAPE1.B8.26 v35.56,54.36
P8.27  (via drill 0.38 pad 0.18)
  Top 0.254: BB.CAPE1.T8.27 v38.1,52.32
  Bottom 0.254: v38.1,52.32 BB.CAPE1.T8.27
P8.28  (via drill 0.38 pad 0.18)
  Top 0.254: BB.CAPE1.B8.28 v38.1,54.36
  Bottom 0.254: v38.1,54.36 BB.CAPE1.B8.28
P8.29  (via drill 0.38 pad 0.18)
  Top 0.254: v40.64,52.32 BB.CAPE1.B8.29
  Bottom 0.254: BB.CAPE1.B8.29 v40.64,52.32
P8.30  (via drill 0.38 pad 0.18)
  Top 0.254: v40.64,54.36 BB.CAPE1.B8.30
  Bottom 0.254: BB.CAPE1.B8.30 v40.64,54.36
P8.31  (via drill 0.38 pad 0.18)
  Top 0.254: BB.CAPE1.B8.31 v43.18,52.32
  Bottom 0.254: v43.18,52.32 BB.CAPE1.B8.31
P8.32  (via drill 0.38 pad 0.18)
  Top 0.254: BB.CAPE1.T8.32 v43.18,54.36
  Bottom 0.254: v43.18,54.36 BB.CAPE1.T8.32
P8.33  (via drill 0.38 pad 0.18)
  Top 0.254: v45.72,52.32 BB.CAPE1.T8.33
  Bottom 0.254: BB.CAPE1.T8.33 v45.72,52.32
P8.34  (via drill 0.38 pad 0.18)
  Top 0.254: v45.72,54.36 BB.CAPE1.B8.34
  Bottom 0.254: BB.CAPE1.B8.34 v45.72,54.36
P8.35  (via drill 0.38 pad 0.18)
  Top 0.254: BB.CAPE1.T8.35 v48.26,52.32
  Bottom 0.254: v48.26,52.32 BB.CAPE1.T8.35
P8.36  (via drill 0.38 pad 0.18)
  Top 0.254: v48.26,54.36 BB.CAPE1.T8.36
  Bottom 0.254: BB.CAPE1.T8.36 v48.26,54.36
P8.37  (via drill 0.38 pad 0.18)
  Top 0.254: v50.8,52.32 BB.CAPE1.T8.37
  Bottom 0.254: BB.CAPE1.T8.37 v50.8,52.32
P8.38  (via drill 0.38 pad 0.18)
  Top 0.254: BB.CAPE1.B8.38 v50.8,54.36
  Bottom 0.254: v50.8,54.36 BB.CAPE1.B8.38
P8.39  (via drill 0.38 pad 0.18)
  Top 0.254: BB.CAPE1.T8.39 v53.34,52.32
  Bottom 0.254: v53.34,52.32 BB.CAPE1.T8.39
P8.40  (via drill 0.38 pad 0.18)
  Top 0.254: v53.34,54.36 BB.CAPE1.B8.40
  Bottom 0.254: BB.CAPE1.B8.40 v53.34,54.36
P8.41  (via drill 0.38 pad 0.18)
  Top 0.254: v55.88,52.32 BB.CAPE1.B8.41
  Bottom 0.254: BB.CAPE1.B8.41 v55.88,52.32
P8.42  (via drill 0.38 pad 0.18)
  Top 0.254: BB.CAPE1.B8.42 v55.88,54.36
  Bottom 0.254: v55.88,54.36 BB.CAPE1.B8.42
P8.43  (via drill 0.38 pad 0.18)
  Top 0.254: BB.CAPE1.B8.43 v58.42,52.32
  Bottom 0.254: v58.42,52.32 BB.CAPE1.B8.43
P8.44  (via drill 0.38 pad 0.18)
  Top 0.254: v58.42,54.36 BB.CAPE1.T8.44
  Bottom 0.254: BB.CAPE1.T8.44 v58.42,54.36
P8.45  (via drill 0.38 pad 0.18)
  Top 0.254: v60.96,52.32 BB.CAPE1.B8.45
  Bottom 0.254: BB.CAPE1.B8.45 v60.96,52.32
P8.46  (via drill 0.38 pad 0.18)
  Top 0.254: BB.CAPE1.B8.46 v60.96,54.36
  Bottom 0.254: v60.96,54.36 BB.CAPE1.B8.46
P9.9  (via drill 0.38 pad 0.18)
  Top 0.254: BB.CAPE1.T9.9 v15.24,4.06
  Bottom 0.254: v15.24,4.06 BB.CAPE1.T9.9
P9.10  (via drill 0.38 pad 0.18)
  Top 0.254: BB.CAPE1.T9.10 v15.24,6.1
  Bottom 0.254: v15.24,6.1 BB.CAPE1.T9.10
P9.11  (via drill 0.38 pad 0.18)
  Top 0.254: v17.78,4.06 BB.CAPE1.B9.11
  Bottom 0.254: BB.CAPE1.B9.11 v17.78,4.06
P9.12  (via drill 0.38 pad 0.18)
  Top 0.254: BB.CAPE1.T9.12 v17.78,6.1
  Bottom 0.254: v17.78,6.1 BB.CAPE1.T9.12
P9.13  (via drill 0.38 pad 0.18)
  Top 0.254: BB.CAPE1.T9.13 v20.32,4.06
  Bottom 0.254: v20.32,4.06 BB.CAPE1.T9.13
P9.14  (via drill 0.38 pad 0.18)
  Top 0.254: BB.CAPE1.T9.14 v20.32,6.1
  Bottom 0.254: v20.32,6.1 BB.CAPE1.T9.14
P9.15  (via drill 0.38 pad 0.18)
  Top 0.254: v22.86,4.06 BB.CAPE1.B9.15
  Bottom 0.254: BB.CAPE1.B9.15 v22.86,4.06
P9.16  (via drill 0.38 pad 0.18)
  Top 0.254: v22.86,6.1 BB.CAPE1.B9.16
  Bottom 0.254: BB.CAPE1.B9.16 v22.86,6.1
P9.17  (via drill 0.38 pad 0.18)
  Top 0.254: BB.CAPE1.B9.17 v25.4,4.06
  Bottom 0.254: v25.4,4.06 BB.CAPE1.B9.17
P9.18  (via drill 0.38 pad 0.18)
  Top 0.254: BB.CAPE1.T9.18 v25.4,6.1
  Bottom 0.254: v25.4,6.1 BB.CAPE1.T9.18
P9.21  (via drill 0.38 pad 0.18)
  Top 0.254: v30.48,4.06 BB.CAPE1.T9.21
  Bottom 0.254: BB.CAPE1.T9.21 v30.48,4.06
P9.22  (via drill 0.38 pad 0.18)
  Top 0.254: BB.CAPE1.T9.22 v30.48,6.1
  Bottom 0.254: v30.48,6.1 BB.CAPE1.T9.22
P9.23  (via drill 0.38 pad 0.18)
  Top 0.254: BB.CAPE1.T9.23 v33.02,4.06
  Bottom 0.254: v33.02,4.06 BB.CAPE1.T9.23
P9.24  (via drill 0.38 pad 0.18)
  Top 0.254: v33.02,6.1 BB.CAPE1.B9.24
  Bottom 0.254: BB.CAPE1.B9.24 v33.02,6.1
P9.25  (via drill 0.38 pad 0.18)
  Top 0.254: v35.56,4.06 BB.CAPE1.T9.25
  Bottom 0.254: BB.CAPE1.T9.25 v35.56,4.06
P9.26  (via drill 0.38 pad 0.18)
  Top 0.254: v35.56,6.1 BB.CAPE1.B9.26
  Bottom 0.254: BB.CAPE1.B9.26 v35.56,6.1
P9.27  (via drill 0.38 pad 0.18)
  Top 0.254: BB.CAPE1.T9.27 v38.1,4.06
  Bottom 0.254: v38.1,4.06 BB.CAPE1.T9.27
P9.28  (via drill 0.38 pad 0.18)
  Top 0.254: BB.CAPE1.T9.28 v38.1,6.1
  Bottom 0.254: v38.1,6.1 BB.CAPE1.T9.28
P9.29  (via drill 0.38 pad 0.18)
  Top 0.254: v40.64,4.06 BB.CAPE1.B9.29
  Bottom 0.254: BB.CAPE1.B9.29 v40.64,4.06
P9.30  (via drill 0.38 pad 0.18)
  Top 0.254: v40.64,6.1 BB.CAPE1.B9.30
  Bottom 0.254: BB.CAPE1.B9.30 v40.64,6.1
P9.31  (via drill 0.38 pad 0.18)
  Top 0.254: BB.CAPE1.T9.31 v43.18,4.06
  Bottom 0.254: v43.18,4.06 BB.CAPE1.T9.31
P9.32  (via drill 0.38 pad 0.18)
  Top 0.254: v43.18,6.1 BB.CAPE1.B9.32
  Bottom 0.254: BB.CAPE1.B9.32 v43.18,6.1
P9.33  (via drill 0.38 pad 0.18)
  Top 0.254: v45.72,4.06 BB.CAPE1.T9.33
  Bottom 0.254: BB.CAPE1.T9.33 v45.72,4.06
P9.34  (via drill 0.38 pad 0.18)
  Top 0.254: v45.72,6.1 BB.CAPE1.B9.34
  Bottom 0.254: BB.CAPE1.B9.34 v45.72,6.1
P9.35  (via drill 0.38 pad 0.18)
  Top 0.254: BB.CAPE1.B9.35 v48.26,4.06
  Bottom 0.254: v48.26,4.06 BB.CAPE1.B9.35
P9.36  (via drill 0.38 pad 0.18)
  Top 0.254: BB.CAPE1.T9.36 v48.26,6.1
  Bottom 0.254: v48.26,6.1 BB.CAPE1.T9.36
P9.37  (via drill 0.38 pad 0.18)
  Top 0.254: v50.8,4.06 BB.CAPE1.B9.37
  Bottom 0.254: BB.CAPE1.B9.37 v50.8,4.06
P9.38  (via drill 0.38 pad 0.18)
  Top 0.254: BB.CAPE1.T9.38 v50.8,6.1
  Bottom 0.254: v50.8,6.1 BB.CAPE1.T9.38
P9.39  (via drill 0.38 pad 0.18)
  Top 0.254: BB.CAPE1.B9.39 v53.34,4.06
  Bottom 0.254: v53.34,4.06 BB.CAPE1.B9.39
P9.40  (via drill 0.38 pad 0.18)
  Top 0.254: v53.34,6.1 BB.CAPE1.B9.40
  Bottom 0.254: BB.CAPE1.B9.40 v53.34,6.1
P9.41  (via drill 0.38 pad 0.18)
  Top 0.254: v55.88,4.06 BB.CAPE1.B9.41
  Bottom 0.254: BB.CAPE1.B9.41 v55.88,4.06
P9.42  (via drill 0.38 pad 0.18)
  Top 0.254: v55.88,6.1 BB.CAPE1.B9.42
  Bottom 0.254: BB.CAPE1.B9.42 v55.88,6.1
SCL  (via drill 0.38 pad 0.18)
  Top 0.254: IC1.6 60.08,10.67 v60.58,11.18 61.09,11.69 R7.1 | BB.CAPE1.T9.19 v27.94,4.06
  Bottom 0.254: BB.CAPE1.T9.19 v27.94,4.06 28.75,4.88 61.77,4.88 62.99,6.1 62.99,9.53 61.34,11.18 v60.58,11.18
SDA  (via drill 0.38 pad 0.18)
  Top 0.254: IC1.5 59.93,10.17 v60.2,9.91 60.58,10.29 R8.1 | BB.CAPE1.B9.20 v27.94,6.1
  Bottom 0.254: BB.CAPE1.B9.20 v27.94,6.1 28.75,5.28 61.42,5.28 62.48,6.35 62.48,9.27 61.85,9.91 v60.2,9.91
VCC  (via drill 0.51 pad 0.18)
  other vias: 7.62,6.1 7.62,4.06
  pour Top (rank 2): 6.35,9.65 6.35,0.13 63.25,0.13 63.25,9.53 64.01,10.29 64.01,20.19 62.61,21.59 53.47,21.59 52.07,20.19 52.07,10.92 51.31,10.16 6.86,10.16
  pour Bottom: 8.26,8 6.99,8 6.6,7.62 6.6,2.29 6.99,1.91 8.26,1.91 8.64,2.29 8.64,7.62
VDD_5V  (via drill 0.51 pad 0.18)
  other vias: 10.16,6.1 10.16,4.06
  pour Top: 10.79,8.13 9.53,8.13 9.14,7.75 9.14,2.41 9.53,2.03 10.79,2.03 11.18,2.41 11.18,7.75
  pour Bottom: 10.79,8.13 9.53,8.13 9.14,7.75 9.14,2.41 9.53,2.03 10.79,2.03 11.18,2.41 11.18,7.75
WP
  Top 0.254: IC1.7 59.69,11.17 59.94,11.43 59.94,12.06 61.09,13.22 R3.1 61.09,15.23 JMP1.1

## Text on the board
tPlace: 2 | A2 | BTN | Cape | BTN | 2 | G | RGB | Proto | R | LED | B | LED | 1 | BTN | 1 | BeagleBone | A1 | A0 | WP | 1 | 0 | BTN